# Altium PCB relais.PcbDoc
Units mm, origin at the board's own origin, x right, y up, seen from the top; angles counter-clockwise.
Board outline 136 x 56 mm, 2 copper layers (Top Layer, Bottom Layer); 37 components, 42 nets, 110 pads, 8 vias.
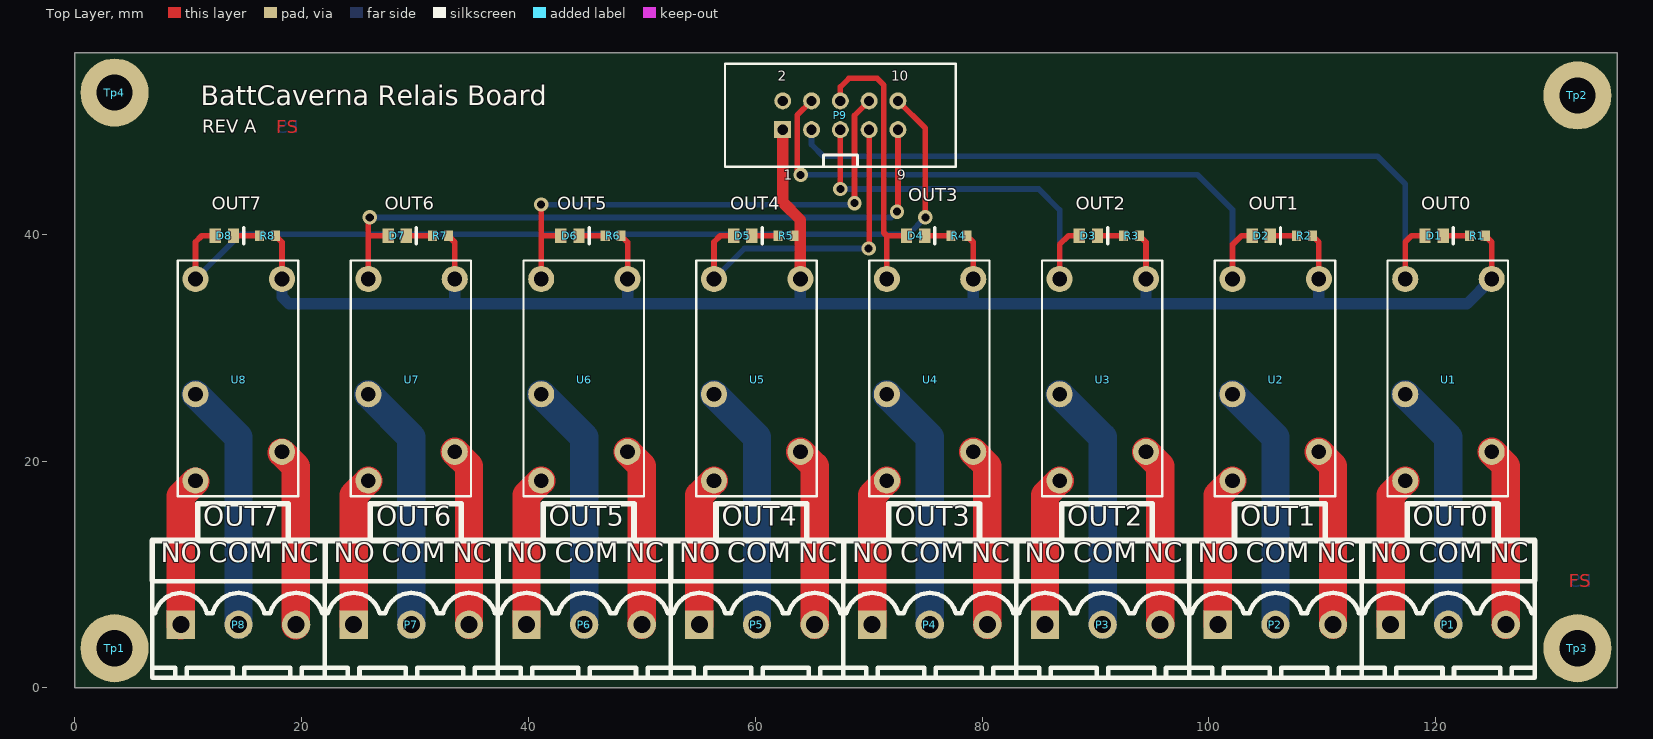
[diagram p0: Top Layer view]
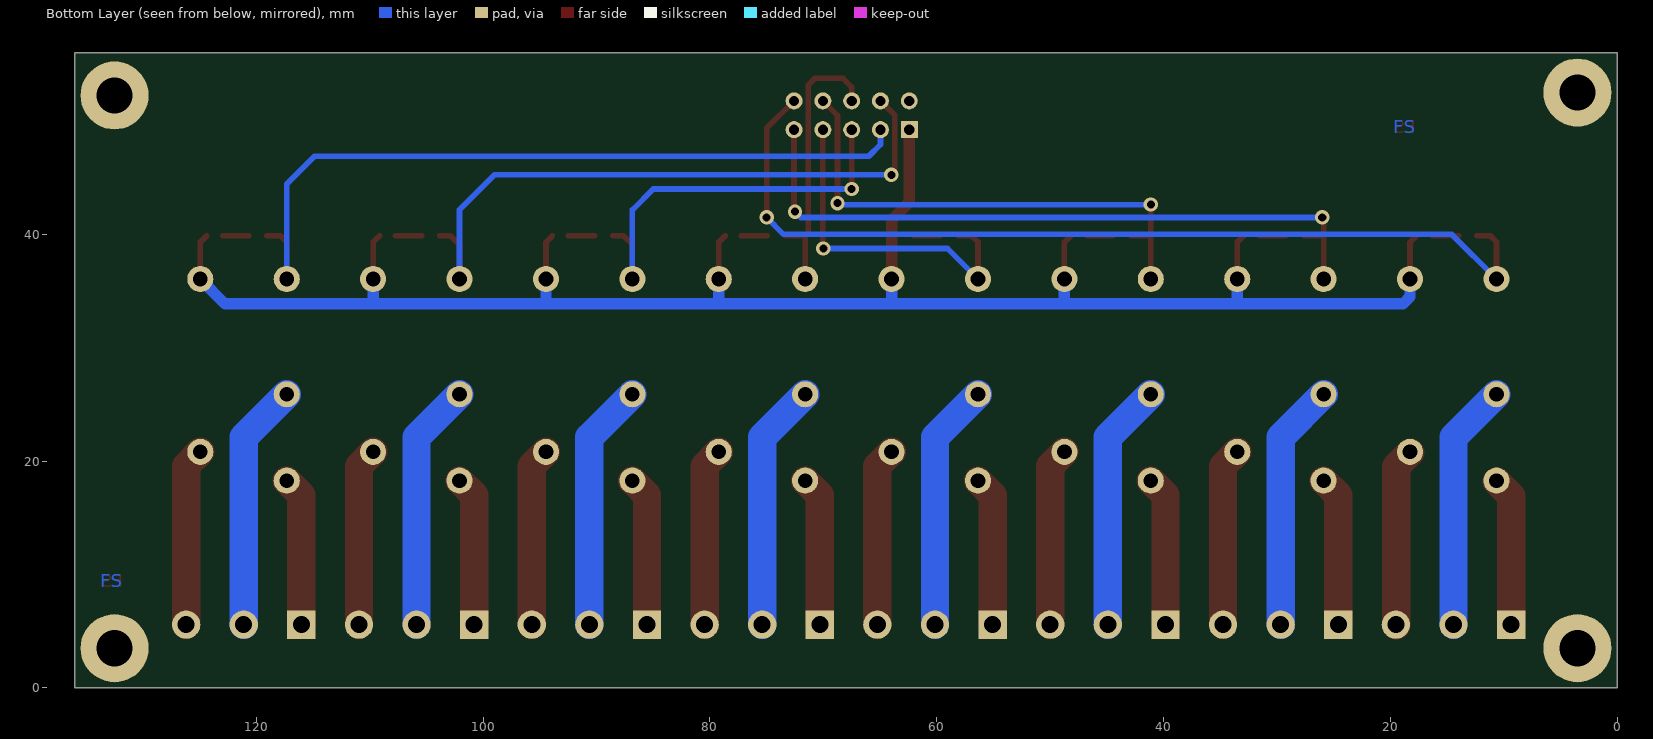
[diagram p1: Bottom Layer view, seen from below]
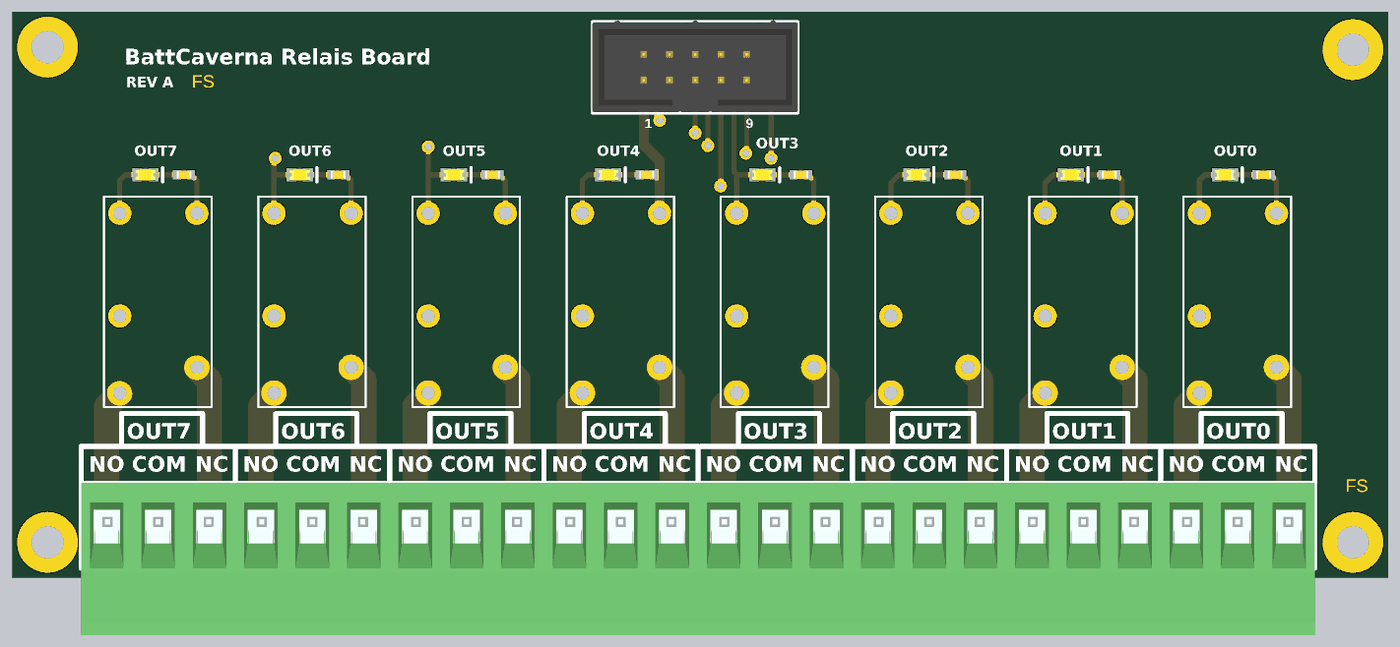
[diagram p2: 3D render of the assembled board from above, using the file's embedded part models]

## Layer stack, top to bottom
Top Solder: solder mask 0.0102, Solder Resist, Dk 3.5
Top Layer: signal copper 0.0356
Dielectric 1: dielectric 0.32, FR-4, Dk 4.8
Bottom Layer: signal copper 0.0356
Bottom Solder: solder mask 0.0102, Solder Resist, Dk 3.5

## Board outline
0,0 0,56 136,56 136,0

## Design rules (kind name [scope] priority, off if disabled: settings)
Clearance [All] p1: gap=0.254
ComponentClearance [All] p1: gap=0 collisioncheckmode=3 verticalgap=0 showdistances=FALSE
PolygonConnect [All] p1: connectstyle=Relief reliefconductorwidth=0.254 reliefentries=4 polygonreliefangle="90 Angle" airgapwidth=0.254
RoutingVias [All] p1: holewidth=0.711 width=1.27 viastyle="Through Hole" minholewidth=0.711 minwidth=1.27 maxholewidth=0.711 maxwidth=1.27
SolderMaskExpansion [All] p1: expansion=0.102
Width [All] p1: maxlimit=10 minlimit=0.254 preferedwidth=0.254
29 further rules are at their usual default settings.

## Classes and differential pairs
component class relais: P1 P2 P3 P4 P5 P6 P7 P8 Tp2

## Components (designator, comment, footprint, x,y, rotation, side; value= is the part's Value field where it differs from the comment)
D1 "O0" 0805_[2012]_LED 119.86,39.87 r0 top
D2 "O4" 0805_[2012]_LED 104.62,39.87 r0 top
D3 "O1" 0805_[2012]_LED 89.38,39.87 r0 top
D4 "O5" 0805_[2012]_LED 74.14,39.87 r0 top
D5 "O2" 0805_[2012]_LED 58.9,39.87 r0 top
D6 "O6" 0805_[2012]_LED 43.66,39.87 r0 top
D7 "O3" 0805_[2012]_LED 28.42,39.87 r0 top
D8 "O7" 0805_[2012]_LED 13.18,39.87 r0 top
P1 "OUT0" TBLOCK_1X3_5.08MM_THD 121.11,5.58 r0 top
P2 "OUT1" TBLOCK_1X3_5.08MM_THD 105.87,5.58 r0 top
P3 "OUT2" TBLOCK_1X3_5.08MM_THD 90.63,5.58 r0 top
P4 "OUT3" TBLOCK_1X3_5.08MM_THD 75.39,5.58 r0 top
P5 "OUT4" TBLOCK_1X3_5.08MM_THD 60.15,5.58 r0 top
P6 "OUT5" TBLOCK_1X3_5.08MM_THD 44.91,5.58 r0 top
P7 "OUT6" TBLOCK_1X3_5.08MM_THD 29.67,5.58 r0 top
P8 "OUT7" TBLOCK_1X3_5.08MM_THD 14.43,5.58 r0 top
P9 "IN_AUX" HEADER_2X5_2.54MM_THD_BOXED 67.5,50.5 r0 top
R1 "2K2" 0603_[1608] 123.67,39.87 r0 top
R2 "2K2" 0603_[1608] 108.43,39.87 r0 top
R3 "2K2" 0603_[1608] 93.19,39.87 r0 top
R4 "2K2" 0603_[1608] 77.95,39.87 r0 top
R5 "2K2" 0603_[1608] 62.71,39.87 r0 top
R6 "2K2" 0603_[1608] 47.47,39.87 r0 top
R7 "2K2" 0603_[1608] 32.23,39.87 r0 top
R8 "2K2" 0603_[1608] 16.99,39.87 r0 top
Tp1 "" Hole_M3x6mm#1 3,3.75 r0 top
Tp2 "" Hole_M3x6mm#2 133,52.5 r0 top
Tp3 "" Hole_M3x6mm#3 133.25,3.5 r0 top
Tp4 "" Hole_M3x6mm#4 3,52.5 r0 top
U1 "Relays SPCO" RELAYS_SPCO_THD_20x10mirror 117.32,36.06 r270 top
U2 "Relays SPCO" RELAYS_SPCO_THD_20x10mirror 102.08,36.06 r270 top
U3 "Relays SPCO" RELAYS_SPCO_THD_20x10mirror 86.84,36.06 r270 top
U4 "Relays SPCO" RELAYS_SPCO_THD_20x10mirror 71.6,36.06 r270 top
U5 "Relays SPCO" RELAYS_SPCO_THD_20x10mirror 56.36,36.06 r270 top
U6 "Relays SPCO" RELAYS_SPCO_THD_20x10mirror 41.12,36.06 r270 top
U7 "Relays SPCO" RELAYS_SPCO_THD_20x10mirror 25.88,36.06 r270 top
U8 "Relays SPCO" RELAYS_SPCO_THD_20x10mirror 10.64,36.06 r270 top

## Footprints (in the part's own frame and the unit in brackets; to place one, negate y for a bottom-side part, rotate by r counter-clockwise, add the part's x,y. Pads: shape width x height; smd on the part's side, far side on the other; paste and mask are expansions set on the pad)
0603_[1608] [mm] "Chip Capacitor, Body 1.6x0.8mm, IPC High Density"
  rect 0.8x0.9 smd: 1(-0.7,0) 2(0.7,0)
  body extent -0.75,-0.4 0.75,0.4, height 0.67
0805_[2012]_LED [mm] "SMD led 0805 size"
  rect 1x1.3 smd: 1(-0.8,0) 2(0.8,0)
  silkscreen extent 1.7,-0.7 1.7,0.7, body extent -1.01,-0.63 1.01,0.62, height 1.1
HEADER_2X5_2.54MM_THD_BOXED [mm] "pin header 2.54mm 2row 10pin boxed"
  rect 1.5x1.5 hole 0.9: 1(-5.08,-1.27)
  round 1.5 hole 0.9: 2(-5.08,1.27) 3(-2.54,-1.27) 4(-2.54,1.27) 5(0,-1.27) 6(0,1.27) 7(2.54,-1.27) 8(2.54,1.27) 9(5.08,-1.27) 10(5.08,1.27)
  silkscreen extent -10.18,-4.55 10.18,4.55, body extent -10.18,-4.4 10.18,4.65, height 8.9
Hole_M3x6mm#1 [mm]
  round 6 hole 3.2 paste-10: 1(0.5,-0.25)
Hole_M3x6mm#2 [mm]
  round 6 hole 3.2 paste-10: 1(-0.5,-0.25)
Hole_M3x6mm#3 [mm]
  round 6 hole 3.2 paste-10: 1(-0.75,0)
Hole_M3x6mm#4 [mm]
  round 6 hole 3.2 paste-10: 1(0.5,0)
RELAYS_SPCO_THD_20x10mirror [mm]
  round 2.3 hole 1.3: COM(10.16,0) NC(15.24,7.62) NO(17.78,0) T1(0,7.62) T2(0,0)
  silkscreen extent -1.64,-1.56 19.16,9.06, body extent -1.27,-1.27 19.05,8.89, height 16
TBLOCK_1X3_5.08MM_THD [mm] "Terminal block 5.08mm 3p"
  rect 2.5x2.5 hole 1.5: 1(-5.08,0)
  round 2.5 hole 1.5: 2(0,0) 3(5.08,0)
  silkscreen extent -7.62,-4.69 7.62,3.81, body extent -7.62,-11.28 7.62,3.82, height 18.45

## Part data
D1 D2 D3 D4 D5 D6 D7 D8: library part LED, "Multicolor LED"
P1 P2 P3 P4 P5 P6 P7 P8: library part "Header 3", "Header, 3-Pin"
P9: library part "Header 5X2", "Header, 5-Pin, Dual row"
R1 R2 R3 R4 R5 R6 R7 R8: library part Res1, "Resistor"
Tp1 Tp2 Tp3 Tp4: library part Test_point
U1 U2 U3 U4 U5 U6 U7 U8: library part "Relay SPCO"

## Via types
v1: diameter 1.27, hole 0.711, Top Layer to Bottom Layer, 8 vias

## Nets (pads, with @x,y where several pads share a name; then routed paths per layer and width w, separated by ;. In a path a pad name is that pad's centre, name@x,y a point inside that pad or via, vN(x,y) a via of type N, cw(c..) or ccw(c..) an arc to the next point about the centre after c; other vN are vias at no path point)
+12V: P9.1 R1.2 R2.2 R3.2 R4.2 R5.2 R6.2 R7.2 R8.2 U1.T1 U2.T1 U3.T1 U4.T1 U5.T1 U6.T1 U7.T1 U8.T1 | length 164.6
  Top Layer w0.5: R8.2 18.26,39.3 U8.T1 ; R7.2 33.5,39.3 U7.T1 ; R6.2 48.74,39.3 U6.T1 ; R4.2 79.22,39.3 U4.T1 ; R3.2 94.46,39.3 U3.T1 ; R2.2 109.7,39.3 U2.T1 ; R1.2 124.94,39.3 U1.T1
  Top Layer w1: P9.1 62.42,42.83 63.98,41.27 U5.T1
  Bottom Layer w0.5: 109.7,33.92 109.75,33.87
  Bottom Layer w1: U8.T1 18.26,34.49 18.88,33.87 109.75,33.87 122.75,33.87 U1.T1 ; 33.5,33.87 U7.T1 ; 48.74,33.88 U6.T1 ; 63.98,33.89 U5.T1 ; 79.22,33.9 U4.T1 ; 94.46,33.91 U3.T1 ; 109.7,33.92 U2.T1
GND: P9.2
NetD1_1: D1.1 P9.3 U1.T2 | length 68.7
  Top Layer w0.5: U1.T2 117.32,39.32 117.87,39.87 D1.1
  Bottom Layer w0.5: P9.3 64.96,47.929 66,46.889 114.861,46.889 117.32,44.43 U1.T2
NetD1_2: D1.2 R1.1 | length 2.3
  Top Layer w0.5: D1.2 R1.1
NetD2_1: D2.1 P9.4 U2.T2 | length 57.7
  Top Layer w0.5: v1(64,45.25) 63.706,45.544 63.706,50.516 P9.4 ; U2.T2 102.08,39.08 102.87,39.87 D2.1
  Bottom Layer w0.5: v1(64,45.25) 99,45.25 102.08,42.17 U2.T2
NetD2_2: D2.2 R2.1 | length 2.3
  Top Layer w0.5: D2.2 R2.1
NetD3_1: D3.1 P9.5 U3.T2 | length 36.7
  Top Layer w0.5: v1(67.5,44) P9.5 ; U3.T2@86.75,36.15 U3.T2 86.84,39.09 87.62,39.87 D3.1
  Bottom Layer w0.5: v1(67.5,44) 85,44 86.84,42.16 U3.T2
NetD3_2: D3.2 R3.1 | length 2.3
  Top Layer w0.5: D3.2 R3.1
NetD4_1: D4.1 P9.6 U4.T2 | length 24.6
  Top Layer w0.5: P9.6 67.5,53 68.25,53.75 70.75,53.75 71.326,53.174 71.326,40.144 71.6,39.87 ; U4.T2 71.6,39.87 ; D4.1 71.6,39.87
NetD4_2: D4.2 R4.1 | length 2.3
  Top Layer w0.5: D4.2 R4.1
NetD5_1: D5.1 P9.7 U5.T2 | length 30.5
  Top Layer w0.5: U5.T2 56.36,39.32 56.91,39.87 D5.1 ; v1(70,38.75) 70.04,38.79 P9.7
  Bottom Layer w0.5: U5.T2 59.05,38.75 v1(70,38.75)
NetD5_2: D5.2 R5.1 | length 2.3
  Top Layer w0.5: D5.2 R5.1
NetD6_1: D6.1 P9.8 U6.T2 | length 45.3
  Top Layer w0.5: U6.T2 v1(41.12,42.63) ; 41.37,39.87 D6.1 ; v1(68.75,42.75) 68.754,42.754 68.754,50.484 P9.8
  Bottom Layer w0.5: v1(41.12,42.63) 41.139,42.611 v1@68.75,42.611
NetD6_2: D6.2 R6.1 | length 2.3
  Top Layer w0.5: D6.2 R6.1
NetD7_1: D7.1 P9.9 U7.T2 | length 61.5
  Top Layer w0.5: U7.T2 25.88,39.87 ; v1(26,41.5) 25.88,41.38 25.88,39.87 ; D7.1 25.88,39.87 ; v1@72.5,41.75 72.58,41.83 P9.9
  Bottom Layer w0.5: v1(26,41.5) 26.009,41.491 71.991,41.491 v1(72.5,42)
NetD7_2: D7.2 R7.1 | length 2.3
  Top Layer w0.5: D7.2 R7.1
NetD8_1: D8.1 P9.10 U8.T2 | length 83.5
  Top Layer w0.5: U8.T2 10.64,39.32 11.19,39.87 D8.1 ; P9.10 75,49.35 75,41.75 75.25,41.5 v1(75,41.5)
  Bottom Layer w0.5: U8.T2 14.58,40 73.5,40 v1(75,41.5)
NetD8_2: D8.2 R8.1 | length 2.3
  Top Layer w0.5: D8.2 R8.1
NetP1_1: P1.1 U1.NO | length 13.2
  Top Layer w2.5: P1.1 116.03,16.99 U1.NO
NetP1_2: P1.2 U1.COM | length 21.9
  Bottom Layer w2.5: U1.COM 121.11,22.11 P1.2
NetP1_3: P1.3 U1.NC | length 15.8
  Top Layer w2.5: U1.NC 126.19,19.57 P1.3
NetP2_1: P2.1 U2.NO | length 13.2
  Top Layer w2.5: P2.1 100.79,16.99 U2.NO
NetP2_2: P2.2 U2.COM | length 21.9
  Bottom Layer w2.5: U2.COM 105.87,22.11 P2.2
NetP2_3: P2.3 U2.NC | length 15.8
  Top Layer w2.5: U2.NC 110.95,19.57 P2.3
NetP3_1: P3.1 U3.NO | length 13.2
  Top Layer w2.5: P3.1 85.55,16.99 U3.NO
NetP3_2: P3.2 U3.COM | length 21.9
  Bottom Layer w2.5: U3.COM 90.63,22.11 P3.2
NetP3_3: P3.3 U3.NC | length 15.8
  Top Layer w2.5: U3.NC 95.71,19.57 P3.3
NetP4_1: P4.1 U4.NO | length 13.2
  Top Layer w2.5: P4.1 70.31,16.99 U4.NO
NetP4_2: P4.2 U4.COM | length 21.9
  Bottom Layer w2.5: U4.COM 75.39,22.11 P4.2
NetP4_3: P4.3 U4.NC | length 15.8
  Top Layer w2.5: U4.NC 80.47,19.57 P4.3
NetP5_1: P5.1 U5.NO | length 13.2
  Top Layer w2.5: P5.1 55.07,16.99 U5.NO
NetP5_2: P5.2 U5.COM | length 21.9
  Bottom Layer w2.5: U5.COM 60.15,22.11 P5.2
NetP5_3: P5.3 U5.NC | length 15.8
  Top Layer w2.5: U5.NC 65.23,19.57 P5.3
NetP6_1: P6.1 U6.NO | length 13.2
  Top Layer w2.5: P6.1 39.83,16.99 U6.NO
NetP6_2: P6.2 U6.COM | length 21.9
  Bottom Layer w2.5: U6.COM 44.91,22.11 P6.2
NetP6_3: P6.3 U6.NC | length 15.8
  Top Layer w2.5: U6.NC 49.99,19.57 P6.3
NetP7_1: P7.1 U7.NO | length 13.2
  Top Layer w2.5: P7.1 24.59,16.99 U7.NO
NetP7_2: P7.2 U7.COM | length 21.9
  Bottom Layer w2.5: U7.COM 29.67,22.11 P7.2
NetP7_3: P7.3 U7.NC | length 15.8
  Top Layer w2.5: U7.NC 34.75,19.57 P7.3
NetP8_1: P8.1 U8.NO | length 13.2
  Top Layer w2.5: P8.1@9.33,5.51 9.33,16.92 U8.NO@10.62,18.21
NetP8_2: P8.2 U8.COM | length 21.9
  Bottom Layer w2.5: U8.COM 14.43,22.11 P8.2
NetP8_3: P8.3 U8.NC | length 15.8
  Top Layer w2.5: U8.NC@18.24,20.75 19.49,19.5 P8.3@19.49,5.51
pads on no net: Tp1.1 Tp2.1 Tp3.1 Tp4.1

## Other copper
Top Layer:
  text "FS" at 17.75,48.5 h2
  text "FS" at 131.75,8.5 h2
Bottom Layer:
  text "FS" at 19.75,48.5 h2
  text "FS" at 133.75,8.5 h2

## Silkscreen, mask and mechanical layers (free items; w line width, h text height)
Top Overlay:
  lines w0.5: 6.82,13 22.07,13 22.07,9.5 ; 6.83,9.5 6.83,13 ; 10.82,13.25 10.82,16.25 18.82,16.25 18.82,13.25 ; 22.06,13 37.31,13 37.31,9.5 ; 26.06,13.25 26.06,16.25 34.06,16.25 34.06,13.25 ; 37.3,13 52.55,13 52.55,9.5 ; 41.3,13.25 41.3,16.25 49.3,16.25 49.3,13.25 ; 52.54,13 67.79,13 67.79,9.5 ; 56.54,13.25 56.54,16.25 64.54,16.25 64.54,13.25 ; 67.78,13 83.03,13 83.03,9.5 ; 71.78,13.25 71.78,16.25 79.78,16.25 79.78,13.25 ; 83.02,13 98.27,13 98.27,9.5 ; 87.02,13.25 87.02,16.25 95.02,16.25 95.02,13.25 ; 98.26,13 113.51,13 113.51,9.5 ; 102.26,13.25 102.26,16.25 110.26,16.25 110.26,13.25 ; 113.5,9.5 113.5,9.75 ; 113.5,13 128.75,13 128.75,9.5 ; 117.5,13.25 117.5,16.25 125.5,16.25 125.5,13.25
  text "BattCaverna Relais Board" at 11.1,50.8 h3
  text "REV A" at 11.25,48.55 h2
  text "OUT3" at 73.5,42.5 h2
  text "OUT7" at 12.07,41.75 h2
  text "OUT6" at 27.31,41.75 h2
  text "OUT5" at 42.55,41.75 h2
  text "OUT4" at 57.79,41.75 h2
  text "OUT2" at 88.27,41.75 h2
  text "OUT1" at 103.51,41.75 h2
  text "OUT0" at 118.75,41.75 h2
  text "OUT7" at 11.32,13.75 h3
  text "OUT6" at 26.56,13.75 h3
  text "OUT5" at 41.8,13.75 h3
  text "OUT4" at 57.04,13.75 h3
  text "OUT3" at 72.28,13.75 h3
  text "OUT2" at 87.52,13.75 h3
  text "OUT1" at 102.76,13.75 h3
  text "OUT0" at 118,13.75 h3
  text "NO" at 7.57,10.5 h3
  text "COM" at 11.82,10.5 h3
  text "NC" at 18.07,10.5 h3
  text "NO" at 22.81,10.5 h3
  text "COM" at 27.06,10.5 h3
  text "NC" at 33.31,10.5 h3
  text "NO" at 38.05,10.5 h3
  text "COM" at 42.3,10.5 h3
  text "NC" at 48.55,10.5 h3
  text "NO" at 53.29,10.5 h3
  text "COM" at 57.54,10.5 h3
  text "NC" at 63.79,10.5 h3
  text "NO" at 68.53,10.5 h3
  text "COM" at 72.78,10.5 h3
  text "NC" at 79.03,10.5 h3
  text "NO" at 83.77,10.5 h3
  text "COM" at 88.02,10.5 h3
  text "NC" at 94.27,10.5 h3
  text "NO" at 99.01,10.5 h3
  text "COM" at 103.26,10.5 h3
  text "NC" at 109.51,10.5 h3
  text "NO" at 114.25,10.5 h3
  text "COM" at 118.5,10.5 h3
  text "NC" at 124.75,10.5 h3
Top Solder:
  text "FS" at 17.75,48.5 h2
  text "FS" at 131.75,8.5 h2
Bottom Solder:
  text "FS" at 19.75,48.5 h2
  text "FS" at 133.75,8.5 h2
Mechanical 1:
  the board outline again, w0.2

## Text inside footprints (layer, text, board x,y; h text height)
D1: Mechanical 3 "K" at 120.935,39.97 h0.8
D2: Mechanical 3 "K" at 105.695,39.97 h0.8
D3: Mechanical 3 "K" at 90.455,39.97 h0.8
D4: Mechanical 3 "K" at 75.215,39.97 h0.8
D5: Mechanical 3 "K" at 59.975,39.97 h0.8
D6: Mechanical 3 "K" at 44.735,39.97 h0.8
D7: Mechanical 3 "K" at 29.495,39.97 h0.8
D8: Mechanical 3 "K" at 14.255,39.97 h0.8
P9: Top Overlay "2" at 62,53.25 h1.5; Top Overlay "1" at 62.5,44.5 h1.5; Top Overlay "10" at 72,53.25 h1.5; Top Overlay "9" at 72.5,44.5 h1.5